# Altium PCB Fuente_TP1.PcbDoc
Units mm, origin at the board's own origin, x right, y up, seen from the top; angles counter-clockwise.
Board outline 99.95 x 50.04 mm, 2 copper layers (Top Layer, Bottom Layer); 55 components, 32 nets, 129 pads, 10 vias.
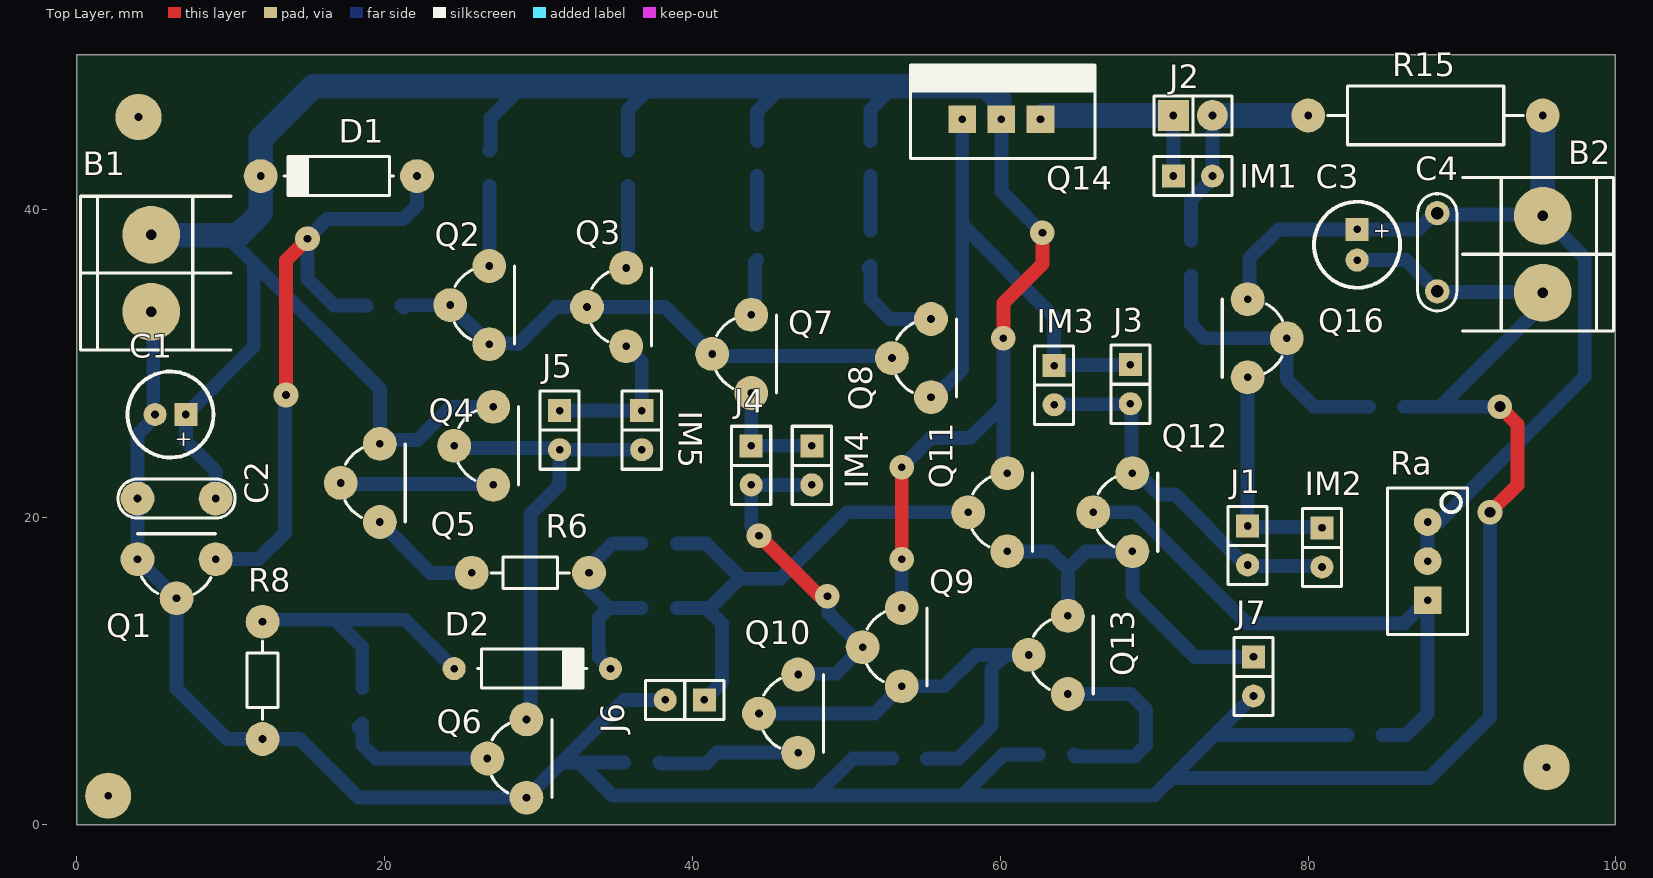
[diagram p0: Top Layer view]
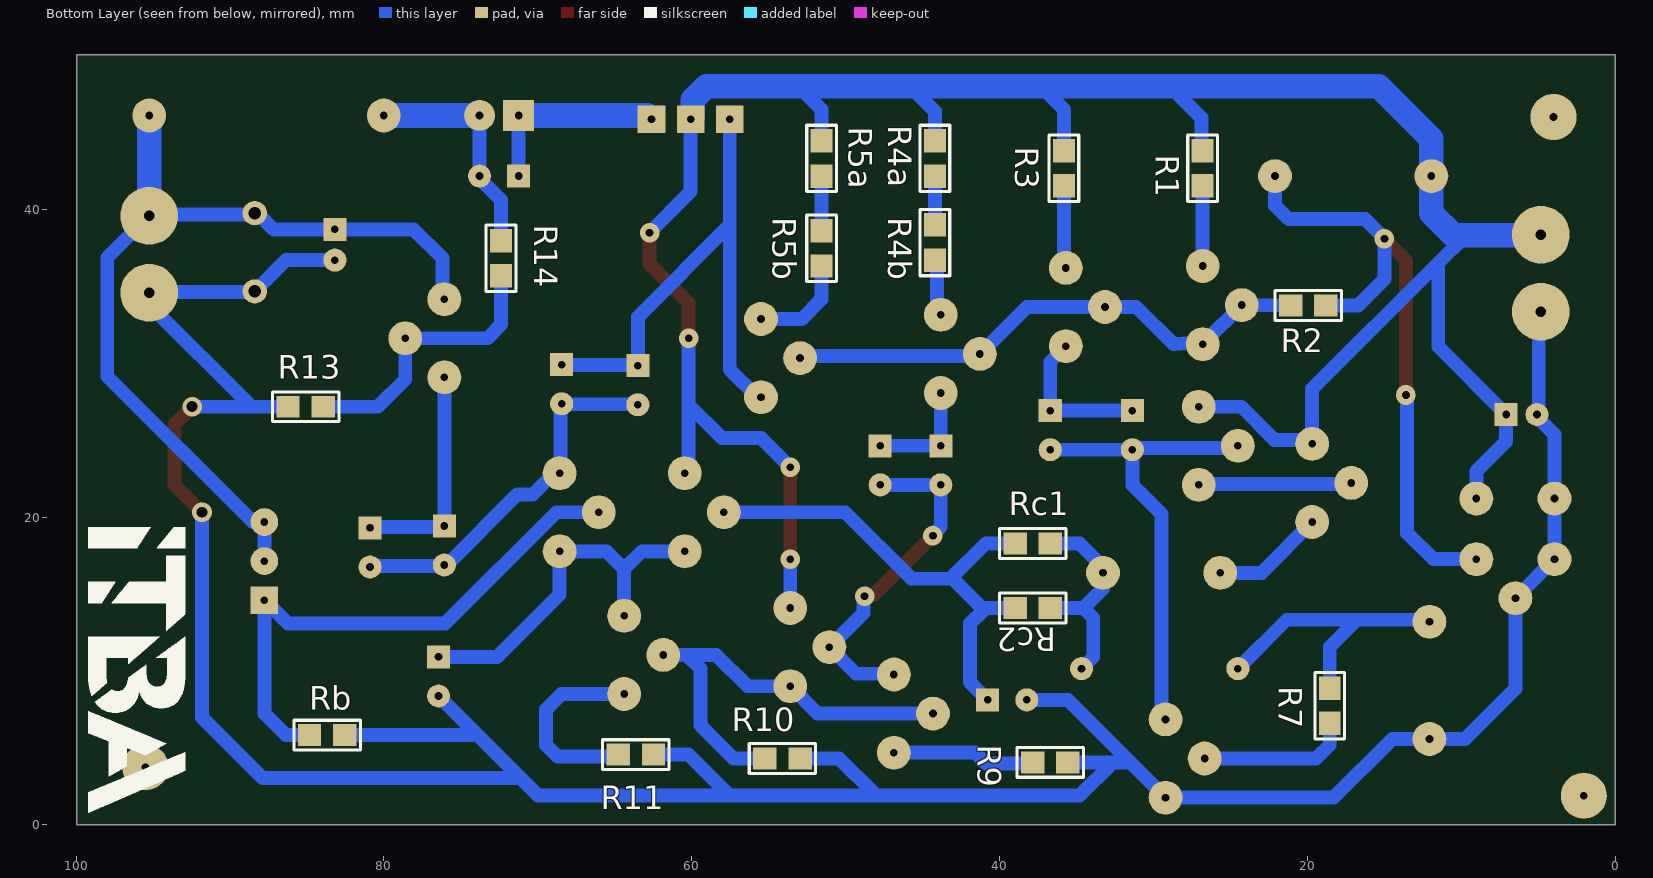
[diagram p1: Bottom Layer view, seen from below]
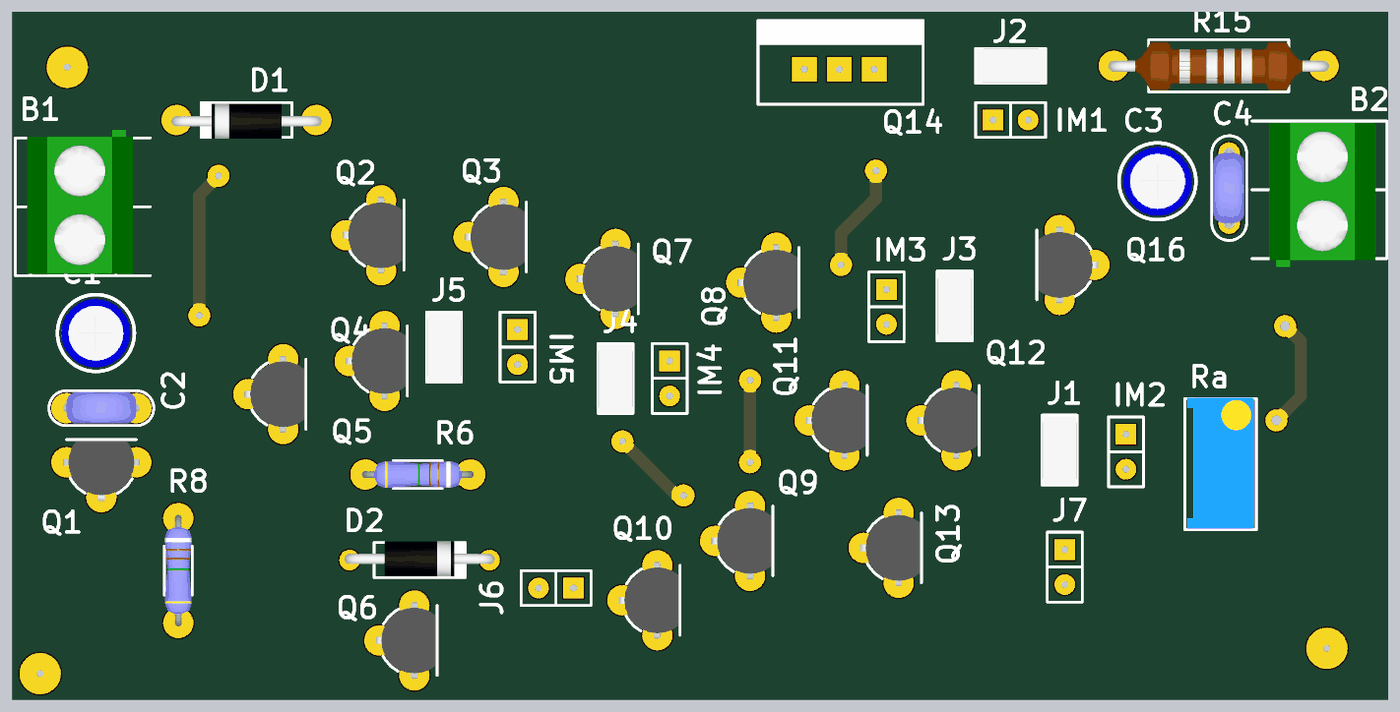
[diagram p2: 3D render of the assembled board from above, using the file's embedded part models]
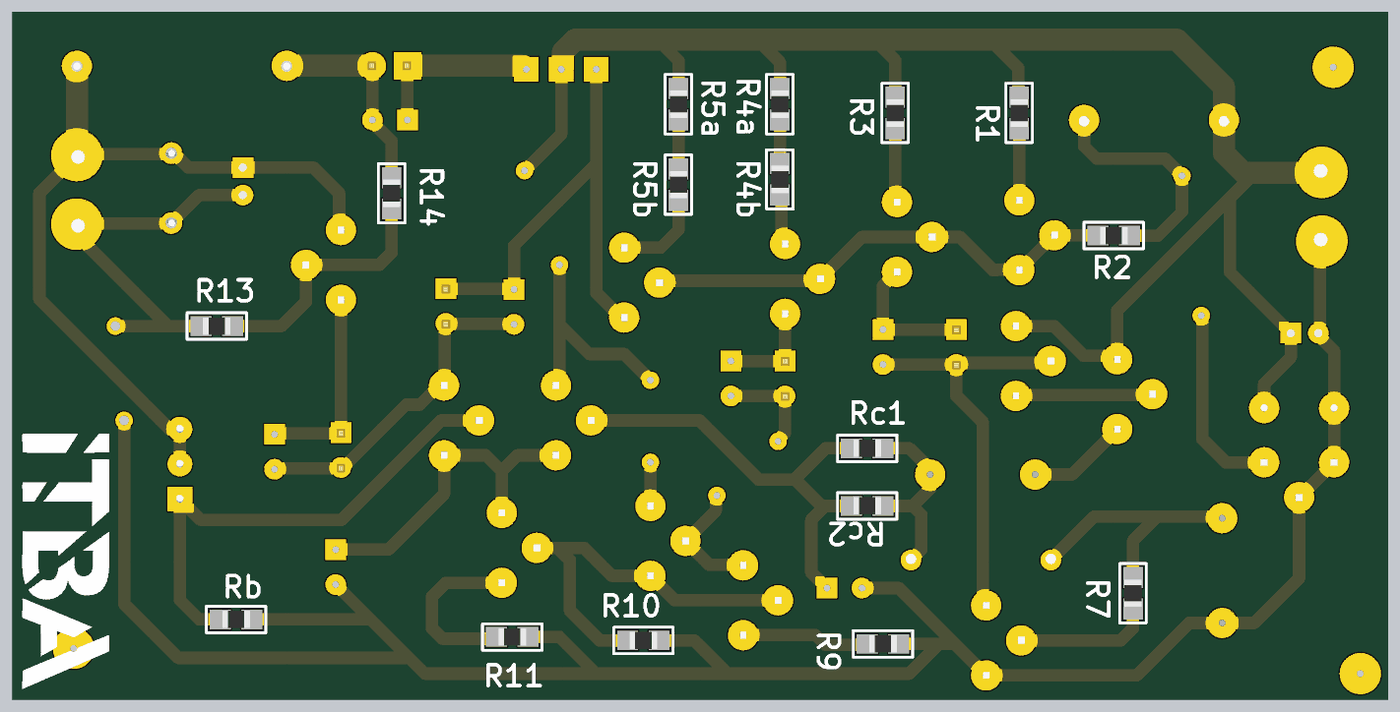
[diagram p3: 3D render of the assembled board from below, using the file's embedded part models]

## Layer stack, top to bottom
Top Solder: solder mask 0.0102, Solder Resist, Dk 3.5
Top Layer: signal copper 0.0356
Dielectric 1: dielectric 0.32, FR-4, Dk 4.8
Bottom Layer: signal copper 0.0356
Bottom Solder: solder mask 0.0102, Solder Resist, Dk 3.5

## Board outline
0,0 99.949,0 99.949,50.038 0,50.038

## Design rules (kind name [scope] priority, off if disabled: settings)
Clearance [All] p1: gap=0.4 ignorepadtopadclearanceinfootprint=FALSE
PolygonConnect [All] p1: connectstyle=Relief reliefconductorwidth=0.254 reliefentries=4 polygonreliefangle="90 Angle" airgapwidth=0.254
RoutingVias [All] p1: holewidth=1.5 width=2.5 viastyle="Through Hole" minholewidth=1.5 minwidth=2.5 maxholewidth=1.5 maxwidth=2.5
SolderMaskExpansion [All] p1: expansion=0.102
Width [All] p1: maxlimit=1.6 minlimit=0.9 preferedwidth=0.9
30 further rules are at their usual default settings.

## Components (designator, comment, footprint, x,y, rotation, side; value= is the part's Value field where it differs from the comment)
B1 "" BORNERA2 4.826,35.854 r0 top
B2 "" BORNERA2 95.25,37.084 r180 top
C1 "10u" CAP100RP 6.08,26.67 r180 top
C2 "100n" CAP200#1 6.477,21.209 r180 top
C3 "10u" CAP100RP 83.185,37.703 r270 top
C4 "100n" CAP200#2 88.392,37.211 r270 top
D1 "6.8" DO41#1 17.018,42.164 r180 top
D2 "4.7" DO41#2 29.591,10.16 r0 top
IM1 "" SIP2 72.517,42.164 r0 top
IM2 "" SIP2 80.899,18.034 r270 top
IM3 "" SIP2 63.5,28.575 r270 top
IM4 "" SIP2 47.752,23.368 r270 top
IM5 "" SIP2 36.703,25.654 r270 top
J1 "" JUMPER2#1 76.073,18.161 r270 top
J2 "" JUMPER2#2 72.517,46.101 r0 top
J3 "" JUMPER2#1 68.453,28.639 r270 top
J4 "" JUMPER2#1 43.815,23.368 r270 top
J5 "" JUMPER2#1 31.369,25.654 r270 top
J6 "CON2" SIP2 39.497,8.128 r180 top
J7 "CON2" SIP2 76.454,9.652 r270 top
Q1 "MPF102" TO92 6.477,16.002 r0 top
Q2 "2N2907" TO92 25.527,33.782 r270 top
Q3 "2N2907" TO92 34.417,33.655 r270 top
Q4 "2N2222" TO92 25.781,24.638 r270 top
Q5 "2N2222" TO92 18.415,22.225 r270 top
Q6 "2N2222" TO92 27.94,4.318 r270 top
Q7 "2N2907" TO92 42.545,30.607 r270 top
Q8 "2N2907" TO92 54.229,30.338 r270 top
Q9 "2N2222" TO92 52.324,11.557 r270 top
Q10 "2N2222" TO92 45.593,7.239 r270 top
Q11 "2N2222" TO92 59.182,20.32 r270 top
Q12 "2N2222" TO92 67.31,20.32 r270 top
Q13 "2N2222" TO92 63.119,11.049 r270 top
Q14 "TIP112" "TO-220 V" 60.071,45.847 r0 top
Q16 "2N2222" TO92 77.343,31.623 r90 top
R1 "82" 0805 26.804,42.672 r90 bottom
R2 "680" 0805 19.939,33.758 r0 bottom
R3 "3900" 0805 35.814,42.672 r90 bottom
R4a "82" 0805 44.196,43.307 r270 bottom
R4b "82" 0805 44.196,37.846 r90 bottom
R5a "82" 0805 51.562,43.307 r270 bottom
R5b "82" 0805 51.562,37.465 r90 bottom
R6 "100" RES300 33.274,16.383 r180 top
R7 "33k" 0805 18.542,7.747 r270 bottom
R8 "180" RES300 12.065,13.208 r270 top
R9 "330" 0805 36.703,4.064 r180 bottom
R10 "22k" 0805 54.102,4.318 r180 bottom
R11 "150" 0805 63.627,4.572 r180 bottom
R13 "4.7k" 0805 85.09,27.178 r0 bottom
R14 "33" 0805 72.39,36.83 r270 bottom
R15 "0.47" RES600 95.25,46.101 r180 top
Ra "PRESET" "PRESET V" 87.767,17.145 r90 top
Rb "RES" 0805 83.693,5.842 r0 bottom
Rc1 "5.6k" 0805 37.846,18.288 r180 bottom
Rc2 "10k" 0805 37.846,14.097 r180 bottom

## Footprints (in the part's own frame and the unit in brackets; to place one, negate y for a bottom-side part, rotate by r counter-clockwise, add the part's x,y. Pads: shape width x height; smd on the part's side, far side on the other; paste and mask are expansions set on the pad)
0805 [mil] "Pasivo 0805"
  rect 60x56 smd: 1(-45,0) 2(45,0)
  silkscreen extent -85,-38 85,38, body extent -39,-25 39,25, height 15
BORNERA2 [mm] "Bornera con Tornillos 5mm separación"
  round 3.75 hole 0.7: 1(0,2.5) 2(0,-2.5)
  silkscreen extent -4.6,-5 5.2,5, body extent -3.76,-4.89 3.94,5.61, height 10
CAP100RP [mm] "Body diameter 5mm"
  rect 1.5x1.5 hole 0.5: 1(-1,0)
  round 1.5 hole 0.5: 2(1,0)
  silkscreen extent -2.79,-2.79 2.79,2.79, body extent -2.53,-2.51 2.53,2.54, height 11.53
CAP200#1 [mm]
  round 2.2 hole 0.5: 1(-2.54,0) 2(2.54,0)
  silkscreen extent -3.81,-1.27 3.81,1.27, body extent -2.79,-1.17 2.79,1.12, height 6.24
CAP200#2 [mm]
  round 1.575 hole 0.813: 1(-2.54,0) 2(2.54,0)
  silkscreen extent -3.81,-1.27 3.81,1.27, body extent -2.79,-1.17 2.79,1.12, height 6.24
DO41#1 [mm]
  round 2.2 hole 0.5: 1(-5.08,0) 2(5.08,0)
  silkscreen extent -3.56,-1.27 3.56,1.27, body extent -5.46,-1.19 5.46,1.37, height 2.03
DO41#2 [mm]
  round 1.5 hole 0.5: 1(-5.08,0) 2(5.08,0)
  silkscreen extent -3.56,-1.27 3.56,1.27, body extent -5.46,-1.19 5.46,1.37, height 2.03
JUMPER2#1 [mm]
  rect 1.5x1.5 hole 0.5: 1(-1.27,0)
  round 1.5 hole 0.5: 2(1.27,0)
  silkscreen extent -2.54,-1.27 2.54,1.27, body extent -2.46,-1.27 2.54,1.27, height 9.5
JUMPER2#2 [mm]
  rect 2x2 hole 0.5: 1(-1.27,0)
  round 2 hole 0.5: 2(1.27,0)
  silkscreen extent -2.54,-1.27 2.54,1.27, body extent -2.46,-1.27 2.54,1.27, height 9.5
"PRESET V" [mm]
  rect 1.8x1.8 hole 0.5: 1(-2.54,0)
  round 1.8 hole 0.5: 2(0,0) 3(2.54,0)
  silkscreen extent -4.76,-2.6 4.76,2.6, body extent -4.7,-2.42 4.83,2.42, height 11.55
RES300 [mm]
  round 2.2 hole 0.5: 1(0,0) 2(7.62,0)
  silkscreen extent 1.27,-1.02 6.35,1.02, body extent -0.25,-0.97 7.87,0.97, height 2.01
RES600 [mm]
  round 2.2 hole 0.5: 1(0,0) 2(15.24,0)
  silkscreen extent 1.27,-1.9 13.97,1.91, body extent -0.4,-1.72 15.64,1.78, height 3.59
SIP2 [mm]
  rect 1.5x1.5 hole 0.5: 1(-1.27,0)
  round 1.5 hole 0.5: 2(1.27,0)
  silkscreen extent -2.54,-1.27 2.54,1.27
TO92 [mm]
  round 2.2 hole 0.5: 1(0,-1.27) 2(2.54,1.27) 3(-2.54,1.27)
  silkscreen extent -2.54,-1 2.54,2.92, body extent -2.79,-1.55 2.79,2.79, height 8
"TO-220 V" [mm]
  rect 1.8x1.8 hole 0.5: 1(-2.54,0) 2(0,0) 3(2.54,0)
  silkscreen extent -5.9,-2.54 6.1,3.54, body extent -5,-2 5,3, height 18

## Part data
B1 B2: library part "BORNERA 2"
C1 C3: library part CAPPOL
C2 C4: library part CAP
D1 D2: library part "DIODO ZENER"
IM1 IM2 IM3 IM4 IM5: library part CON2
J1 J2 J3 J4 J5: library part JUMPER
Q1: "RF Mosfet N-Channel JFET TO-92-3", Package="TO-226-3 ON Semiconductor", Availability=Unavailable, MF="ON Semiconductor", MP=MPF102, Price=None, SnapEDA_Link=https://www.snapeda.com/parts/MPF102/ON%20Semiconductor/view-part/4705681/?ref=snap
Q2 Q3 Q7 Q8: library part "TRANSISTOR PNP"
Q14: Package=None, Availability=Unavailable, MP=TIP112, Price=None
R1 R2 R3 R4a R4b R5a R5b R6 R7 R8 R9 R10 R11 R13 R14 R15 Rc1 Rc2: library part RES

## Free pads (board coordinates)
  round 3 hole 0.5: 6(2.032,1.905) 6(4,46) 6(95.492,3.746)

## Via types
v1: diameter 1.6/1.27 (per signal layer), hole 0.5, Top Layer to Bottom Layer, 8 vias
v2: diameter 1.6/1.27 (per signal layer), hole 0.711, Top Layer to Bottom Layer, 2 vias

## Nets (pads, with @x,y where several pads share a name; then routed paths per layer and width w, separated by ;. In a path a pad name is that pad's centre, name@x,y a point inside that pad or via, vN(x,y) a via of type N, cw(c..) or ccw(c..) an arc to the next point about the centre after c; other vN are vias at no path point)
GND: B1.2 B2.1 C1.2 C2.2 C3.2 C4.2 J6.2 J7.2 Q1.1 Q1.3 Q6.2 R8.2 R9.2 R10.2 R11.2 R13.2 Rb.1 | length 208.4
  Top Layer w0.9: v2(91.821,20.32) 93.599,22.098 93.599,26.035 v2(92.456,27.178)
  Bottom Layer w0.9: B1.2@4.826,33.314 4.965,33.175 4.965,26.785 C1.2 5.08,26.508 3.937,25.365 C2.2 Q1.3 Q1.1 6.477,8.858 9.747,5.588 R8.2 14.478,5.588 18.288,1.778 Q6.2 31.496,4.064 ; R9.2 32.639,4.064 ; J6.2 35.56,8.128 31.496,4.064 ; 48.133,2.032 50.419,4.318 R10.2 ; R11.2 60.198,4.572 57.531,1.905 ; J7.2 73.914,5.842 ; Rb.1 73.914,5.842 ; C3.2 86.36,36.703 C4.2 88.436,34.627 95.206,34.627 B2.1 95.25,33.813 88.615,27.178 ; R13.2 88.615,27.178 ; v2(91.821,20.32) 91.821,6.993 87.876,3.048 71.12,3.048 ; v2(92.456,27.178) 88.615,27.178 ; 31.496,4.064 32.639,4.064 ; 32.639,4.064 34.798,1.905 57.531,1.905 ; 57.531,1.905 69.977,1.905 71.12,3.048 ; 71.12,3.048 73.914,5.842
NetD1_1: D1.1 Q1.2 R2.1 | length 42
  Top Layer w0.9: v1(13.589,27.94) 13.589,36.69 14.986,38.087 v1(14.986,38.1)
  Bottom Layer w0.9: Q1.2 11.811,17.272 13.518,18.979 13.518,27.869 v1(13.589,27.94) ; R2.1@18.83,33.724 R2.1 16.701,33.758 14.986,35.473 v1(14.986,38.1) 16.256,39.37 21.209,39.37 22.098,40.259 D1.1
NetD2_1: D2.1 R7.1 R8.1 | length 19
  Bottom Layer w0.9: R8.1 12.192,13.335 16.764,13.335 ; R7.1 18.542,11.557 16.764,13.335 ; D2.1 21.336,13.335 16.764,13.335
NetD2_2: D2.2 R6.1 Rc1.2 Rc2.2 | length 13.9
  Bottom Layer w0.9: D2.2 33.909,10.922 33.909,13.462 34.544,14.097 ; Rc2.2 34.544,14.097 ; Rc1.2 34.798,18.288 33.274,16.764 R6.1 33.274,15.367 34.544,14.097
NetIM1_1: IM1.1 J2.1 Q14.3 | length 12.7
  Bottom Layer w0.9: IM1.1 J2.1
  Bottom Layer w1.6: Q14.3 62.865,46.101 J2.1
NetIM1_2: IM1.2 J2.2 R14.1 R15.2 | length 14.9
  Bottom Layer w0.9: R14.1 72.39,40.605 73.787,42.002 IM1.2 J2.2
  Bottom Layer w1.6: J2.2 R15.2
NetIM2_1: IM2.1 J1.1 Q16.3 | length 15.1
  Bottom Layer w0.9: Q16.3@76.454,28.702 Q16.3 J1.1 76.136,19.367 80.835,19.367 IM2.1
NetIM2_2: IM2.2 IM3.2 J1.2 J3.2 Q12.3 | length 24.4
  Bottom Layer w0.9: IM3.2 63.532,27.337 68.421,27.337 J3.2 68.516,27.305 68.516,22.924 Q12.3 68.932,22.86 70.329,21.463 71.339,21.463 75.911,16.891 J1.2 76.136,16.828 80.835,16.828 IM2.2
NetIM3_1: IM3.1 J3.1 Q8.2 Q14.1 | length 35.7
  Bottom Layer w0.9: Q8.2 Q8.2@55.738,27.798 ; Q8.2@55.851,27.798 Q8.2@55.738,27.798 ; Q14.1 57.531,38.989 ; J3.1 68.421,29.877 63.532,29.877 IM3.1 63.5,33.02 57.531,38.989 ; Q8.2@55.738,27.798 57.531,29.591 57.531,38.989
NetIM4_1: IM4.1 J4.1 Q7.2 | length 7.4
  Bottom Layer w0.9: Q7.2 J4.1 IM4.1
NetIM4_2: IM4.2 J4.2 Q9.1 Q10.3 | length 22.7
  Top Layer w0.9: v1(44.323,18.796) 48.189,14.93 48.697,14.93 v1(48.768,14.859)
  Bottom Layer w0.9: v1(44.323,18.796) 44.323,18.896 43.815,19.404 J4.2 IM4.2 ; Q10.3 46.909,9.825 49.322,9.825 Q9.1 48.839,13.772 48.839,14.788 v1(48.768,14.859)
NetIM5_1: IM5.1 J5.1 Q3.2 | length 9.9
  Bottom Layer w0.9: J5.1 IM5.1 36.703,30.099 Q3.2
NetIM5_2: IM5.2 J5.2 Q4.1 Q6.3 | length 30.7
  Bottom Layer w0.9: Q4.1 24.65,24.499 31.254,24.499 J5.2 ; Q6.3 29.464,7.112 29.464,20.193 31.369,22.098 J5.2 ; IM5.2 J5.2
NetQ2_1: Q2.1 Q2.2 Q3.1 Q7.1 Q8.1 R2.2 | length 35.5
  Bottom Layer w0.9: R2.2@21.219,33.631 R2.2 21.094,33.77 24.245,33.77 Q2.1 26.67,31.369 26.804,31.361 28.702,31.242 31.115,33.655 Q3.1 38.227,33.655 Q7.1 41.409,30.473 52.825,30.473 Q8.1
NetQ2_3: Q2.3 R1.1 | length 5.2
  Bottom Layer w0.9: Q2.3 26.801,36.326 26.801,41.525 R1.1
NetQ3_3: Q3.3 R3.1 | length 5.4
  Bottom Layer w0.9: Q3.3 35.814,36.322 R3.1
NetQ4_2: Q4.2 Q5.1 | length 10
  Bottom Layer w0.9: Q5.1 17.209,22.162 26.987,22.162 Q4.2
NetQ5_2: Q5.2 R6.2 | length 7.7
  Bottom Layer w0.9: Q5.2 22.987,16.383 R6.2 R6.2@25.903,16.632
NetQ6_1: Q6.1 R7.2 | length 10.4
  Bottom Layer w0.9: R7.2@18.281,6.343 R7.2 18.542,5.207 19.431,4.318 Q6.1 Q6.1@26.543,4.445
NetQ7_3: Q7.3 R4b.1 | length 3.7
  Bottom Layer w0.9: Q7.3 44.064,33.396 44.064,36.571 R4b.1
NetQ8_3: Q8.3 R5b.1 | length 6.8
  Bottom Layer w0.9: R5b.1@51.435,36.195 R5b.1 51.562,34.163 52.847,32.878 Q8.3
NetQ9_2: Q9.2 Q10.1 Q13.1 R10.1 | length 29.1
  Bottom Layer w0.9: Q10.1 51.816,7.239 Q9.2 56.388,9.017 58.42,11.049 60.325,11.049 ; R10.1 57.277,4.318 59.436,6.477 59.436,10.16 60.325,11.049 ; Q13.1 60.325,11.049
NetQ10_2: Q10.2 R9.1 | length 9.3
  Bottom Layer w0.9: R9.1 37.91,4 40.894,4 41.593,4.699 Q10.2
NetQ12_1: Q12.1 Ra.1 Rb.2 | length 36.2
  Bottom Layer w0.9: Q12.1 68.798,20.32 76.037,13.081 86.243,13.081 Ra.1 87.767,7.249 86.36,5.842 Rb.2
NetQ13_2: Q13.2 R11.1 | length 12.9
  Bottom Layer w0.9: Q13.2 68.453,8.509 69.469,7.493 69.469,5.207 68.707,4.445 64.897,4.445 R11.1
NetQ16_1: Q16.1 R13.1 R14.2 | length 18.5
  Bottom Layer w0.9: R14.2 72.39,32.512 73.279,31.623 Q16.1 78.613,28.956 80.391,27.178 R13.1
NetR4a_2: R4a.2 R4b.2 | length 3.2
  Bottom Layer w0.9: R4b.2 R4a.2
NetR5a_2: R5a.2 R5b.2 | length 3.6
  Bottom Layer w0.9: R5b.2 R5a.2
Vin: B1.1 C1.1 C2.1 D1.2 Q4.3 Q5.3 Q9.3 Q11.3 Q14.2 R1.2 R3.2 R4a.1 R5a.1 | length 168.4
  Top Layer w0.9: v1(53.594,17.272) v1(53.594,23.241) ; v1(60.198,31.623) 60.198,33.909 62.738,36.449 v1(62.738,38.481)
  Bottom Layer w0.9: C2.1 9.017,22.987 7.08,24.924 C1.1 11.493,31.083 11.493,36.512 ; 9.692,38.314 11.493,36.512 ; R1.2 26.877,43.888 26.877,45.927 28.956,48.006 ; Q4.3 24.293,27.178 22.129,25.014 19.934,25.014 Q5.3 19.685,28.321 11.493,36.512 ; R3.2 35.814,46.482 37.084,47.752 37.084,48.006 ; R4a.1 44.196,46.355 45.847,48.006 ; R5a.1 51.562,46.482 52.451,47.371 52.451,48.006 ; Q9.3 v1(53.594,17.272) ; v1(53.594,23.241) 55.499,25.146 58.039,25.146 60.198,27.305 ; Q14.2@59.944,45.974 Q14.2 60.071,41.148 v1(62.738,38.481) ; v1@60.261,31.559 v1(60.198,31.623) 60.198,27.305 ; Q11.3 60.198,23.114 60.198,27.305
  Bottom Layer w1.6: B1.1@4.826,38.314 9.692,38.314 10.501,38.314 11.938,39.751 D1.2 11.938,44.577 15.367,48.006 28.956,48.006 37.084,48.006 45.847,48.006 52.451,48.006 59.055,48.006 59.944,47.117 Q14.2@59.944,45.974
Vout: B2.2 C3.1 C4.1 Q16.2 R15.1 Ra.2 Ra.3 | length 57.8
  Bottom Layer w0.9: Q16.2 76.2,34.29 76.2,36.83 78.073,38.703 C3.1 87.161,38.703 88.209,39.751 C4.1 88.475,39.668 95.167,39.668 B2.2 97.975,36.859 97.975,29.141 88.519,19.685 Ra.3 Ra.2
  Bottom Layer w1.6: B2.2 R15.1
Vpair: J7.1 Q11.2 Q12.2 Q13.3 | length 24.5
  Bottom Layer w0.9: Q11.2 63.246,17.78 64.394,16.632 ; Q13.3 64.394,13.594 64.394,16.632 ; J7.1 72.644,10.922 68.58,14.986 Q12.2 65.543,17.78 64.394,16.632
Vref: J6.1 Q11.1 Rc1.1 Rc2.1 | length 33.4
  Bottom Layer w0.9: Rc2.1 40.894,14.097 41.021,13.97 ; Rc1.1 40.894,18.288 43.18,16.002 ; J6.1 41.91,9.271 41.91,13.081 41.021,13.97 ; Q11.1 50.038,20.32 45.72,16.002 43.18,16.002 ; 41.021,13.97 43.053,16.002 43.18,16.002

## Silkscreen, mask and mechanical layers (free items; w line width, h text height)
Bottom Overlay:
  drawing of 8 lines, arcs and shapes, not listed

## Text inside footprints (layer, text, board x,y; h text height)
C1: Top Overlay "+" at 7.528,25.502 h1.02 r180
C3: Top Overlay "+" at 84.353,39.151 h1.02 r270